# Altium PCB PCB5.PcbDoc
Units mm, origin at the board's own origin, x right, y up, seen from the top; angles counter-clockwise.
Board outline 90 x 98 mm, 2 copper layers (Top Layer, Bottom Layer); 37 components, 41 nets, 179 pads, 5 vias.
Unrouted connection lines stored in the file: 3.
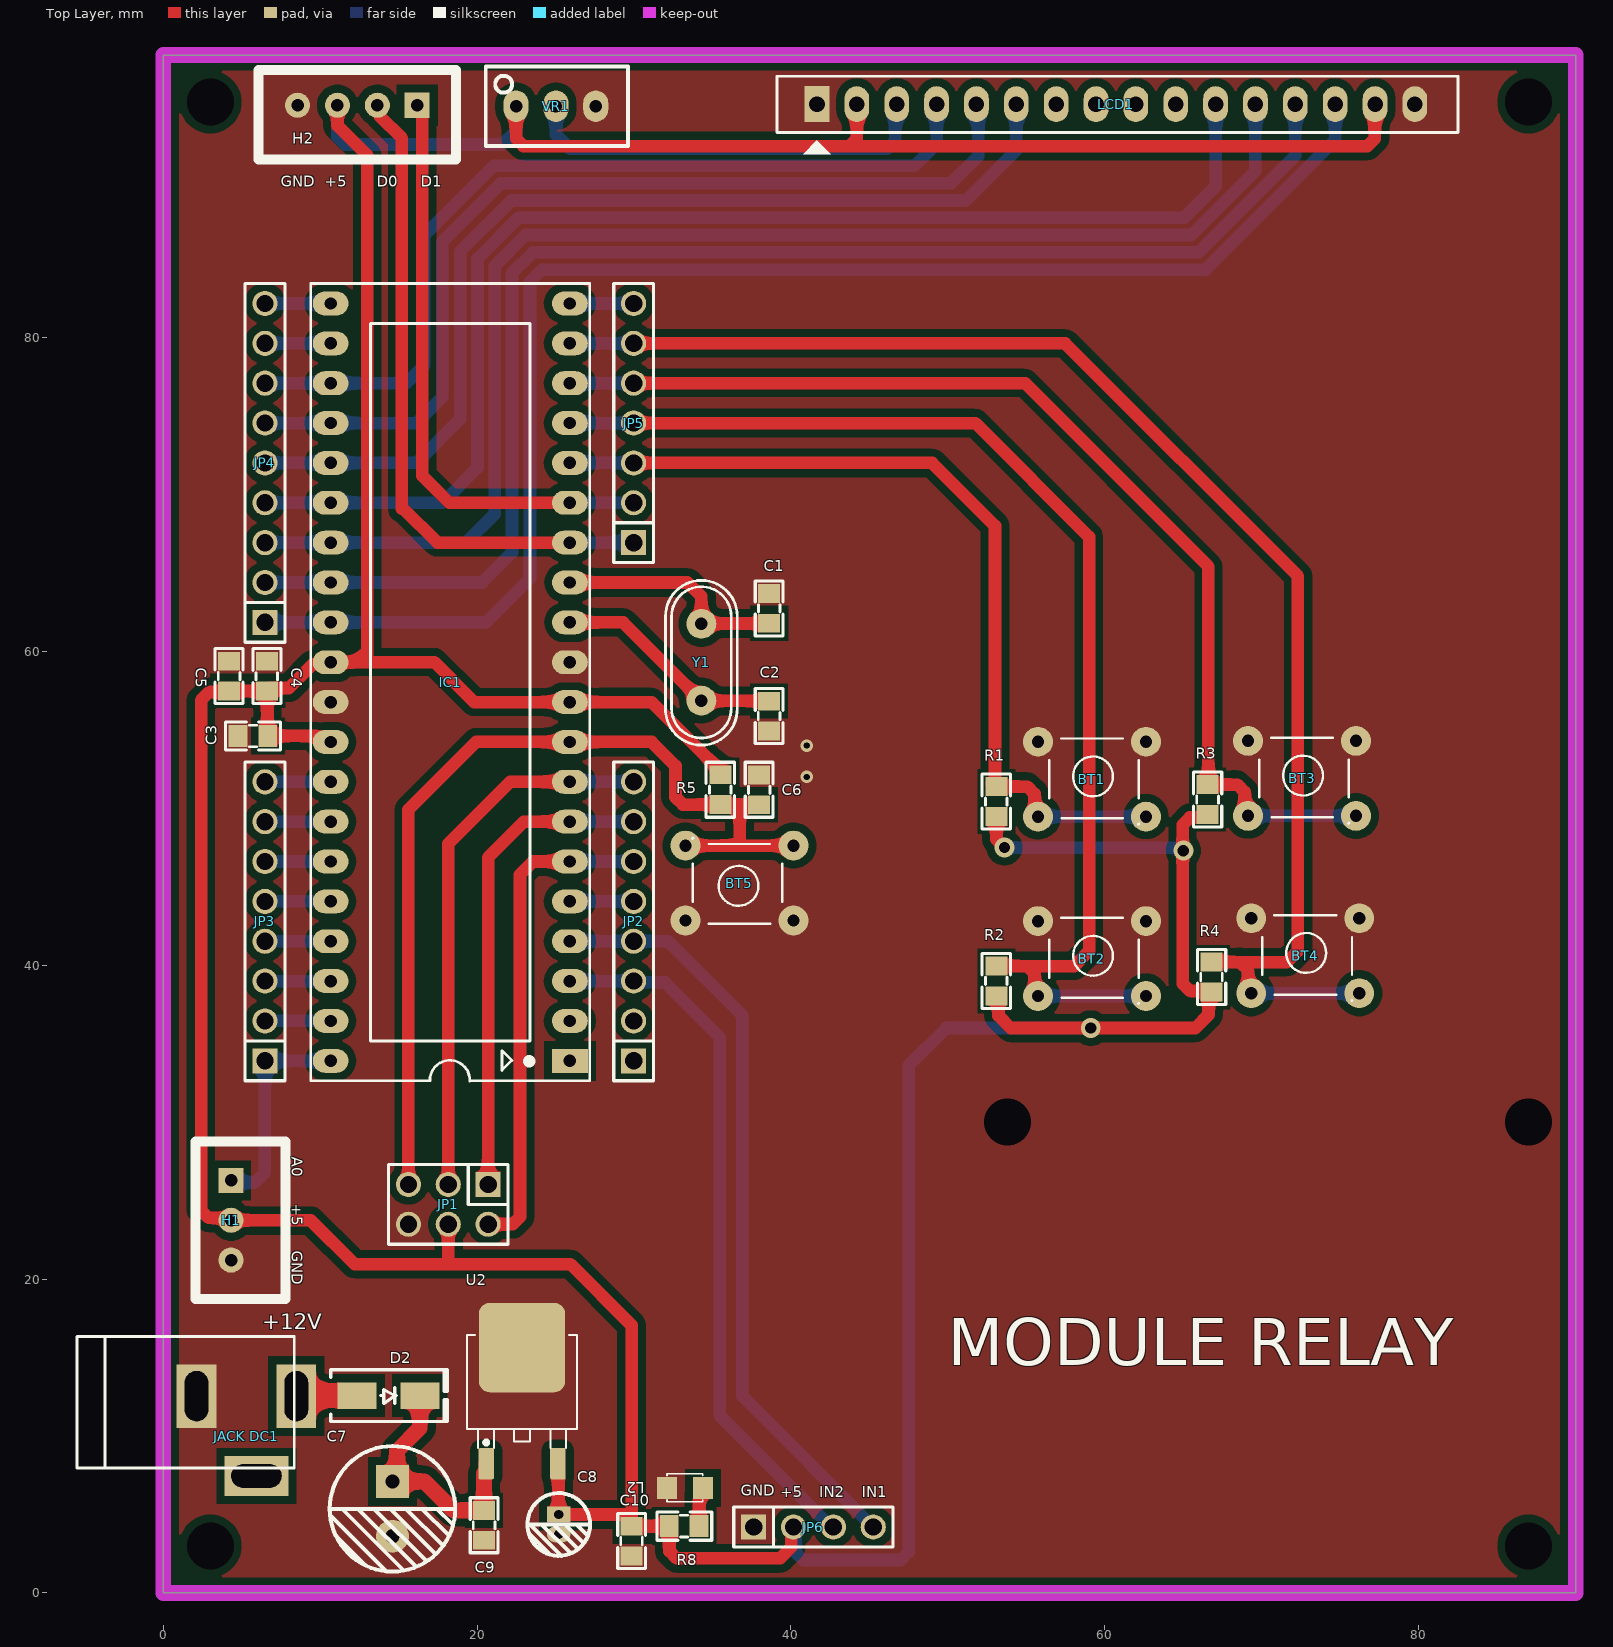
[diagram p0: Top Layer view]
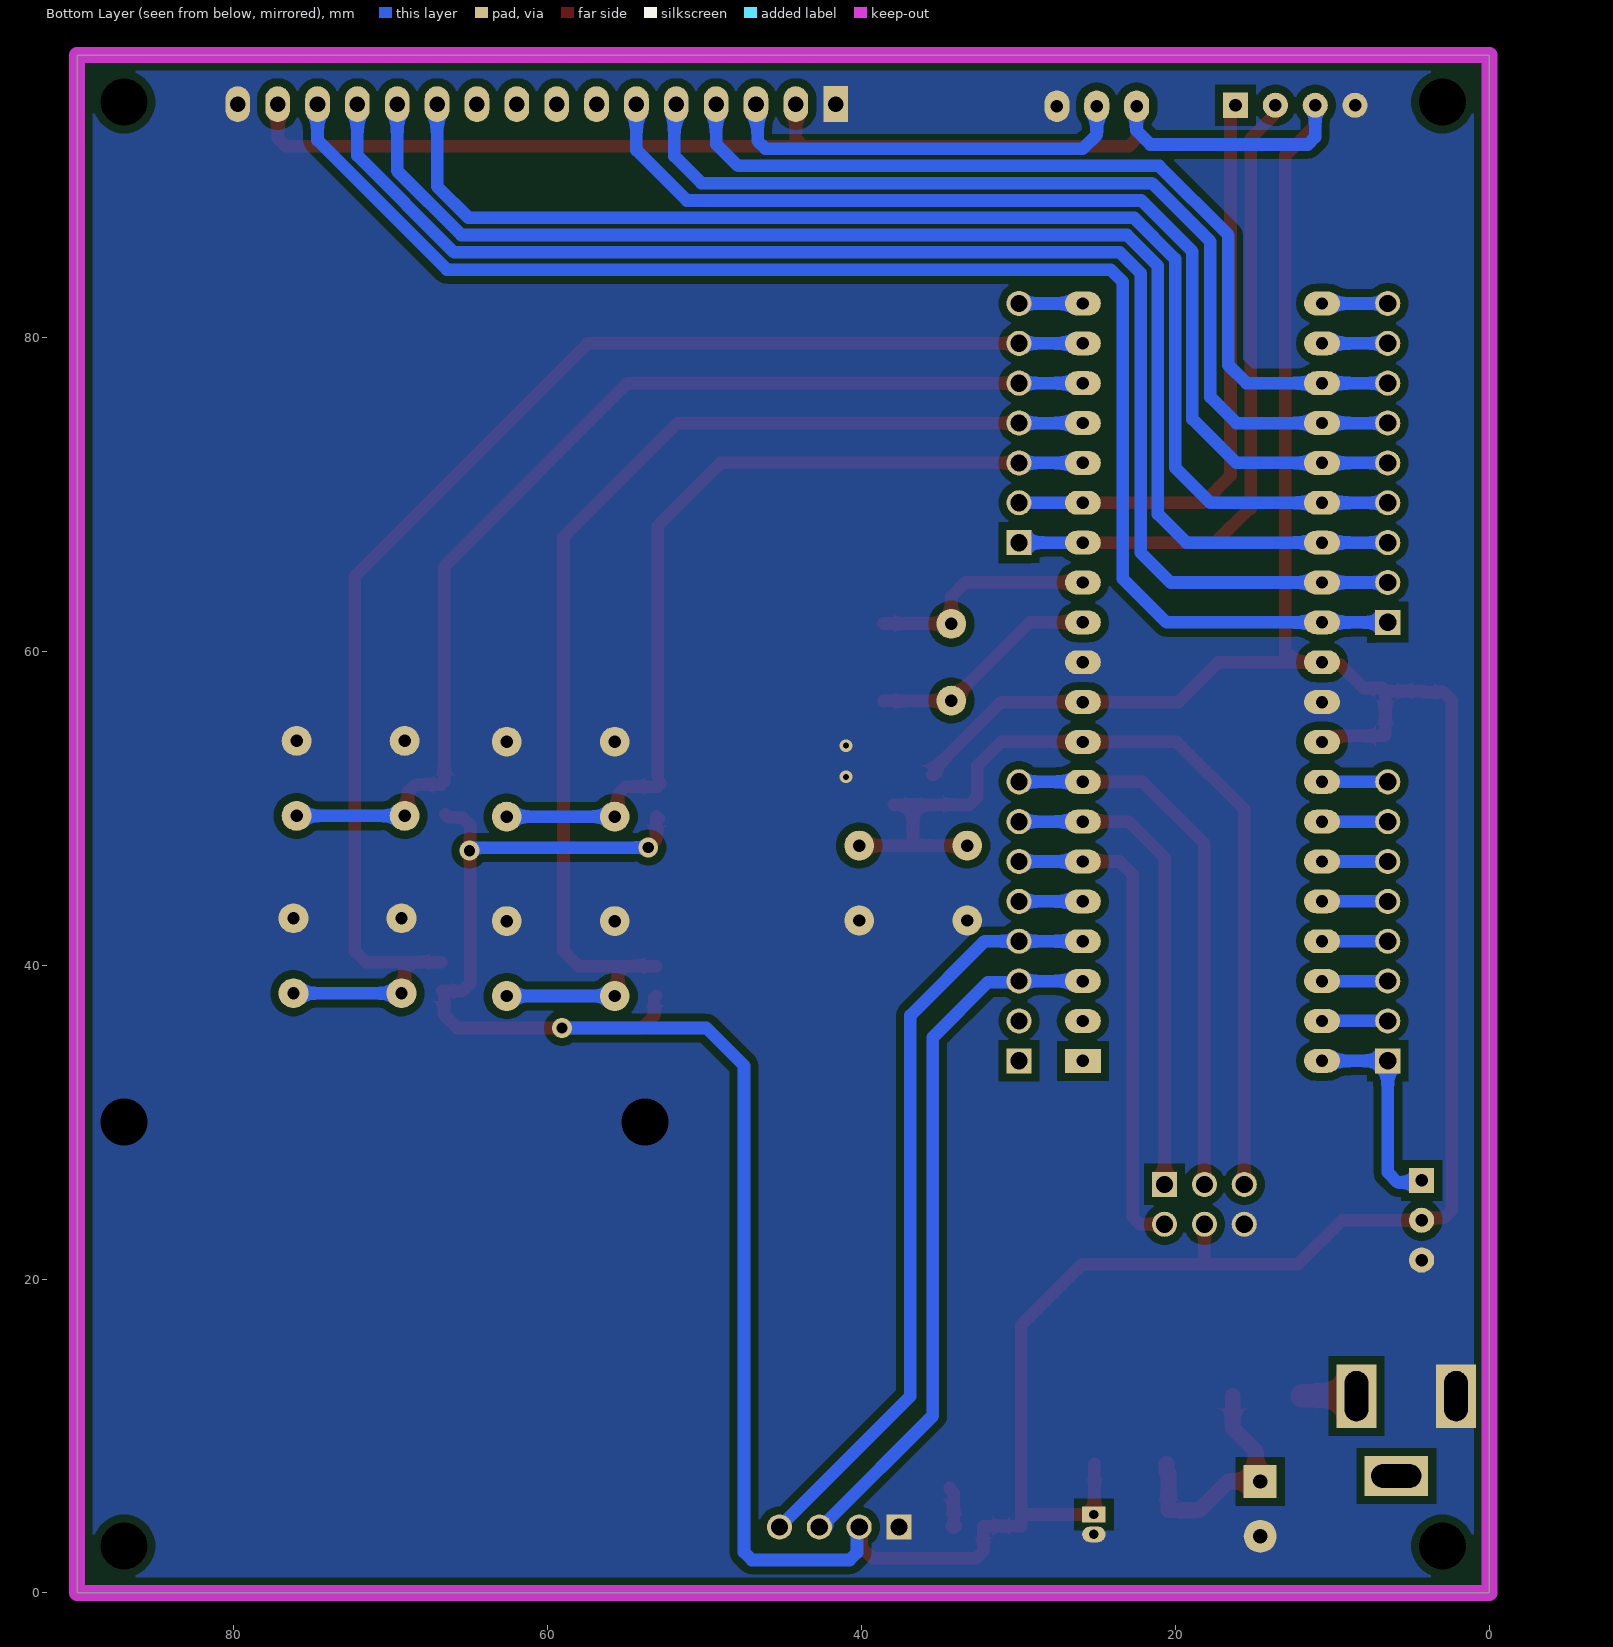
[diagram p1: Bottom Layer view, seen from below]
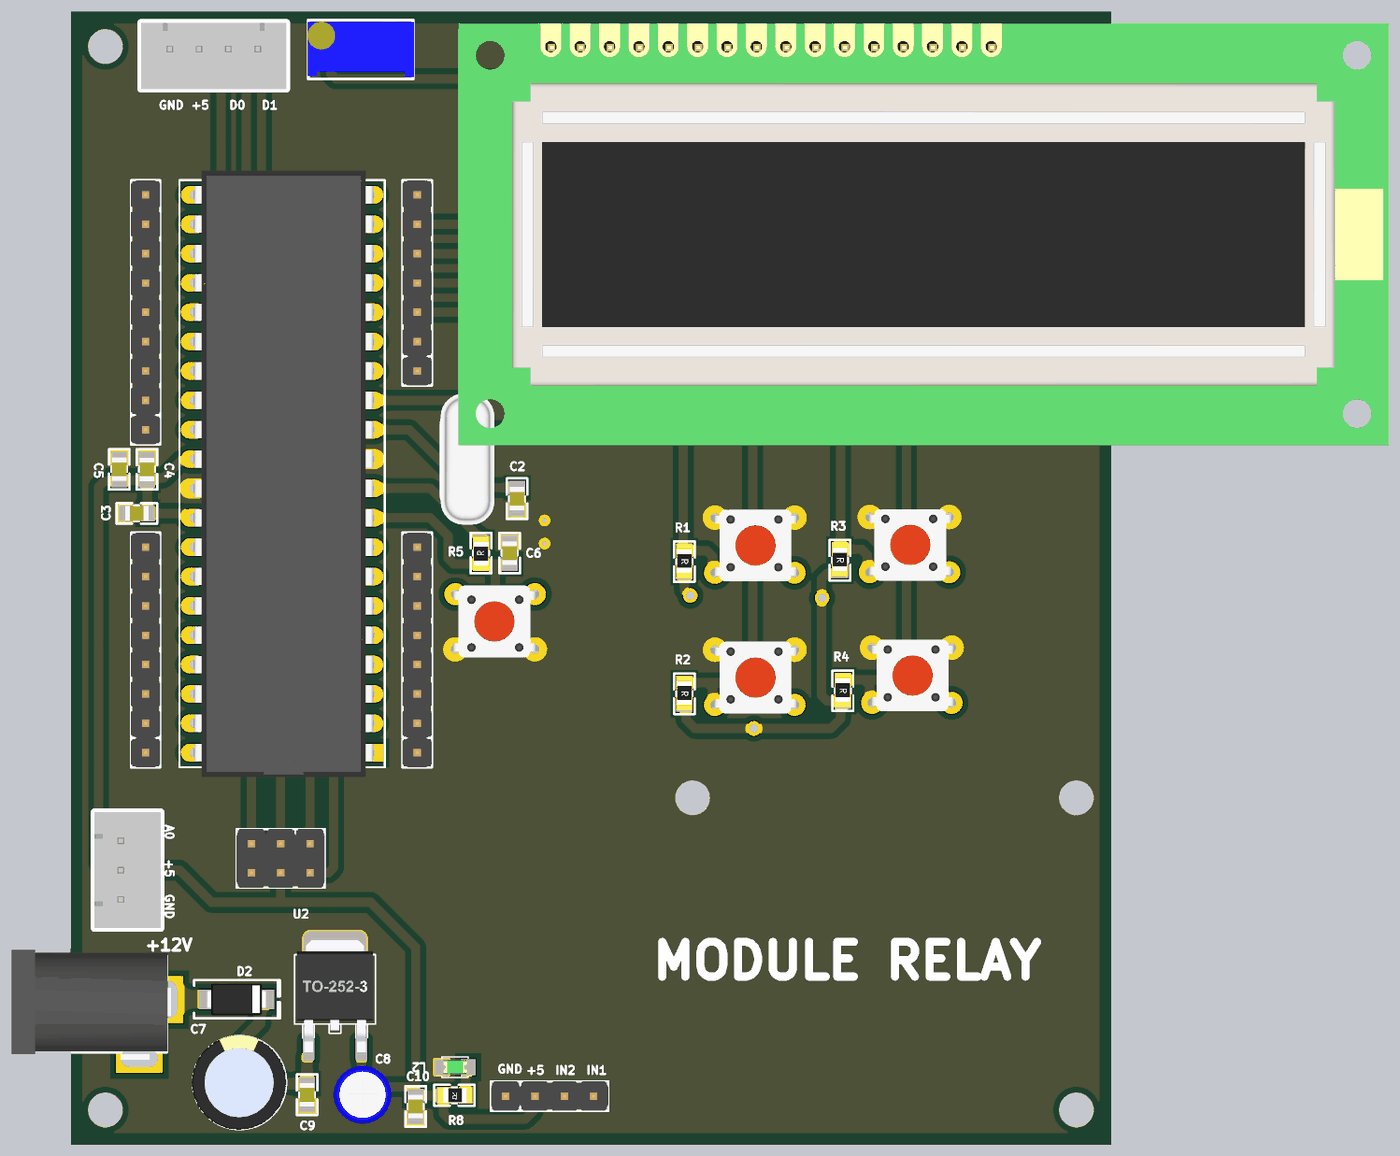
[diagram p2: 3D render of the assembled board from above, using the file's embedded part models]

## Layer stack, top to bottom
Top Solder: solder mask 0.0102, Solder Resist, Dk 3.5
Top Layer: signal copper 0.0356
Dielectric 1: dielectric 0.32, FR-4, Dk 4.8
Bottom Layer: signal copper 0.0356
Bottom Solder: solder mask 0.0102, Solder Resist, Dk 3.5

## Board outline
0,0 90,0 90,98 0,98

## Design rules (kind name [scope] priority, off if disabled: settings)
Clearance [All] p1: gap=0.5 ignorepadtopadclearanceinfootprint=FALSE
PlaneConnect [All] p1: planeconnectstyle=Direct reliefexpansion=0.508 reliefentries=4 reliefconductorwidth=0.254 reliefairgap=0.254
PolygonConnect [All] p1: connectstyle=Direct reliefconductorwidth=0.254 reliefentries=4 polygonreliefangle="90 Angle" airgapwidth=0.254
RoutingVias [All] p1: holewidth=0.711 width=1.27 viastyle="Through Hole" minholewidth=0.711 minwidth=1.27 maxholewidth=0.711 maxwidth=1.27
SolderMaskExpansion [All] p1: expansion=0.102 istentingtop=FALSE
Width [All] p1: maxlimit=1 minlimit=0.3 preferedwidth=0.8
29 further rules are at their usual default settings.

## Components (designator, comment, footprint, x,y, rotation, side; value= is the part's Value field where it differs from the comment)
BT1 "Nut Nhan 4 Chan Cam 6x6" "Nut Nhan 4 Chan Cam 6x6" 56.067,54.447 r0 top
BT2 "Nut Nhan 4 Chan Cam 6x6" "Nut Nhan 4 Chan Cam 6x6" 56.067,43.017 r0 top
BT3 "Nut Nhan 4 Chan Cam 6x6" "Nut Nhan 4 Chan Cam 6x6" 69.453,54.498 r0 top
BT4 "Nut Nhan 4 Chan Cam 6x6" "Nut Nhan 4 Chan Cam 6x6" 69.656,43.195 r0 top
BT5 "Nut Nhan 4 Chan Cam 6x6" "Nut Nhan 4 Chan Cam 6x6" 39.827,42.647 r180 top
C1 "22pF" "tu 0805" 38.608,62.738 r90 top
C2 "22pF" "tu 0805" 38.608,55.88 r270 top
C3 "101" "tu 0805" 5.715,54.61 r180 top
C4 "106" "tu 0805" 6.604,58.42 r270 top
C5 "101" "tu 0805" 4.191,58.42 r90 top
C6 "105" "tu 0805" 37.973,51.181 r270 top
C7 "1000uF" "tu hoa 8mm" 14.605,5.362 r270 top
C8 "10uF" "tu hoa 4mm" 25.2,4.365 r270 top
C9 "104" "tu 0805" 20.447,4.318 r270 top
C10 "104" "tu 0805" 29.845,3.302 r270 top
D2 "M7" "DIODE SMA" 14.351,12.573 r0 top
H1 "Header 3P 2.54 Duc Thang" XH2.54M-3 4.318,26.289 r270 top
H2 "Header 4P 2.54 Duc Thang" XH2.54M-4 16.18,94.8 r180 top
IC1 "ATMEL 16A" DIP40/W0.6 25.908,33.909 r90 top value="Atmega 16L"
"JACK DC1" "JACK DC 5.5" "JACK DC 5.5" 5.3,10 r0 top value="Jac DC"
JP1 "JP 2x3 2.54" "JP 2x3 DT" 18.161,24.765 r180 top
JP2 "JP 1x8 2.54" "JP 1x8 DT" 29.972,33.909 r90 top
JP3 "JP 1x8 2.54" "JP 1x8 DT" 6.477,33.909 r90 top
JP4 "JP 1x9 2.54" "JP 1x9 DT" 6.477,61.849 r90 top
JP5 "JP 1x7 2.54" "JP 1x7 DT" 29.972,66.929 r90 top
JP6 "JP 1x4 2.54" "JP 1x4 DT" 37.62,4.2 r0 top
L2 "LED 0805" LED-0805-Green 34.386,6.7 r180 top
LCD1 "LCD 16x2A" LCD16X2N 41.656,94.869 r0 top value=LCD16x2A
R1 "10k" "tro smd 0805" 53.146,50.434 r270 top
R2 "10k" "tro smd 0805" 53.146,39.004 r270 top
R3 "10k" "tro smd 0805" 66.608,50.561 r270 top
R4 "10k" "tro smd 0805" 66.862,39.258 r270 top
R5 "10k" "tro smd 0805" 35.433,51.181 r90 top
R8 "1k" "tro smd 0805" 33.2,4.2 r180 top
U2 "78M05 SMD TO252" TO252 22.86,11.938 r0 top
VR1 "10K" "Bien Tro Vi Chinh Dung" 25.019,94.742 r0 top
Y1 "16Mhz" "Thach Anh 2 chan cam" 34.29,59.309 r90 top value=4Mhz

## Footprints (in the part's own frame and the unit in brackets; to place one, negate y for a bottom-side part, rotate by r counter-clockwise, add the part's x,y. Pads: shape width x height; smd on the part's side, far side on the other; paste and mask are expansions set on the pad)
"Bien Tro Vi Chinh Dung" [mm] "Bien tro vi chinh"
  oval 1.6x2 hole 0.8: 1(-2.54,0) 2(0,0) 3(2.54,0)
  silkscreen extent -4.47,-2.54 4.6,2.54, body extent -4.54,-2.4 4.66,2.4, height 12.02
"DIODE SMA" [mm] "SMA"
  rect 2.5x1.7 smd: 1(-2,0) 2(2,0)
  silkscreen extent -3.68,-1.65 3.75,1.65, body extent -2.6,-1.37 2.6,1.37, height 2.4
DIP40/W0.6 [mil] "40 PIN, W 600mil, Pin to pin 100mil"
  rect 60x90 hole 31: 1(0,0)
  oval 60x90 hole 31: 2(100,0) 3(200,0) 4(300,0) 5(400,0) 6(500,0) 7(600,0) 8(700,0) 9(800,0) 10(900,0) 11(1000,0) 12(1100,0) 13(1200,0) 14(1300,0) 15(1400,0) 16(1500,0) 17(1600,0) 18(1700,0) 19(1800,0) 20(1900,0) 21(1900,600) 22(1800,600) 23(1700,600) 24(1600,600) 25(1500,600) 26(1400,600) 27(1300,600) 28(1200,600) 29(1100,600) 30(1000,600) 31(900,600) 32(800,600) 33(700,600) 34(600,600) 35(500,600) 36(400,600) 37(300,600) 38(200,600) 39(100,600) 40(0,600)
  silkscreen extent -50,-50 1950,650, body extent -82,-10 1982,600, height 224
"JACK DC 5.5" [mm] "Jac DC input"
  rect 2.54x4.064 hole 1.5 slot 3.2 at 90 deg: 1(3.175,2.54) 2(-3.175,2.54)
  rect 4.064x2.54 hole 1.5 slot 3.2 at 0 deg: 3(0.635,-2.54)
  silkscreen extent -10.79,-2.03 3.05,6.35, body extent -10.42,-2.67 3.4,6.84, height 11.02
"JP 1x4 DT" [mm] "4 pins, 1 row, straight, gold plating"
  rect 1.6x1.6 hole 1.1: 1(0,0)
  round 1.6 hole 1.1: 2(2.54,0) 3(5.08,0) 4(7.62,0)
  silkscreen extent -1.27,-1.27 8.89,1.27, body extent -1.27,-1.27 8.89,1.27, height 8.54
"JP 1x7 DT" [mm] "7 pins, 1 row, straight, gold plating"
  rect 1.6x1.6 hole 1.1: 1(0,0)
  round 1.6 hole 1.1: 2(2.54,0) 3(5.08,0) 4(7.62,0) 5(10.16,0) 6(12.7,0) 7(15.24,0)
  silkscreen extent -1.27,-1.27 16.51,1.27, body extent -1.27,-1.27 16.51,1.27, height 8.54
"JP 1x8 DT" [mm] "8 pins, 1 row, straight, gold plating"
  rect 1.6x1.6 hole 1.1: 1(0,0)
  round 1.6 hole 1.1: 2(2.54,0) 3(5.08,0) 4(7.62,0) 5(10.16,0) 6(12.7,0) 7(15.24,0) 8(17.78,0)
  silkscreen extent -1.27,-1.27 19.05,1.27, body extent -1.27,-1.27 19.05,1.27, height 8.54
"JP 1x9 DT" [mm] "9 pins, 1 row, straight, gold plating"
  rect 1.6x1.6 hole 1.1: 1(0,0)
  round 1.6 hole 1.1: 2(2.54,0) 3(5.08,0) 4(7.62,0) 5(10.16,0) 6(12.7,0) 7(15.24,0) 8(17.78,0) 9(20.32,0)
  silkscreen extent -1.27,-1.27 21.59,1.27, body extent -1.27,-1.27 21.59,1.27, height 8.54
"JP 2x3 DT" [mm]
  rect 1.6x1.6 hole 1.1: 1(-2.54,-1.27)
  round 1.6 hole 1.1: 2(0,-1.27) 3(2.54,-1.27) 4(2.54,1.27) 5(0,1.27) 6(-2.54,1.27)
  silkscreen extent -3.81,-2.54 3.81,2.54, body extent -3.81,-2.54 3.81,2.54, height 8.55
LCD16X2N [mil] "LCD dipslay 16x2, 16 pin"
  rect 62x90 hole 39: 1(0,0)
  oval 62x90 hole 39: 2(100,0) 3(200,0) 4(300,0) 5(400,0) 6(500,0) 7(600,0) 8(700,0) 9(800,0) 10(900,0) 11(1000,0) 12(1100,0) 13(1200,0) 14(1300,0) 15(1400,0) 16(1500,0)
  silkscreen extent -100,-125 1608,70, body extent -320,-1353 2850,84, height 764
LED-0805-Green [mil]
  rect 50x55 smd: 1(0,0) 2(90,0)
  silkscreen extent 0,-35 90,35, body extent 5,-25 85,25, height 43
"Nut Nhan 4 Chan Cam 6x6" [mil] "SW button 4pin, 250 x250 mil"
  round 75 hole 31: 1(-13,-8) 1(258,-8) 2(-13,-196) 2(258,-196)
  silkscreen extent 15,-215 240,0, body extent -31,-225 281,19, height 276
"Thach Anh 2 chan cam" [mm]
  round 1.905 hole 0.8: 1(-2.45,0) 2(2.45,0)
  silkscreen extent -5.28,-2.29 5.21,2.29, body extent -5.68,-2.36 5.68,2.29, height 3.5
TO252 [mm] "TO252"
  round 0.5 on Mech15: 0(0,0)
  rrect25% 1x2 smd: 1(-2.285,-3.7) 3(2.285,-3.7)
  rrect25% 5.5x5.7 smd: 2(0,3.7)
  silkscreen extent -3.5,-2.7 3.5,4.5, body extent -3.3,-3.95 3.3,5.76, height 2.31
"tro smd 0805" [mm]
  rect 1.2x1.4 smd: 1(-0.946,-0.061) 2(0.954,-0.061)
  silkscreen extent -1.75,-0.97 1.75,0.84, body extent -1.56,-0.76 1.44,0.64, height 0.53
"tu 0805" [mm] "Compoment SMD 80x50mil"
  rect 1.2x1.4 smd: 1(-0.946,-0.003) 2(0.954,-0.003)
  silkscreen extent -1.75,-0.89 1.75,0.89, body extent -1.01,-0.64 1.01,0.63, height 0.61
"tu hoa 4mm" [mm]
  rect 1x1.5 hole 0.6: 1(-0.635,0)
  oval 1x1.5 hole 0.6: 2(0.635,0)
  silkscreen extent -2,-2 2.01,2.01, body extent -2.47,-2.47 2.58,2.58, height 14.81
"tu hoa 8mm" [mm]
  rect 2.1x2.1 hole 0.9: 1(-1.75,0)
  round 2.1 hole 0.9: 2(1.75,0)
  silkscreen extent -4,-4 4,4, body extent -4.1,-4.14 4.09,4.06, height 15.4
XH2.54M-3 [mm]
  rect 1.6x1.6 hole 0.8: 1(0,0)
  round 1.6 hole 0.8: 2(2.54,0) 3(5.08,0)
  silkscreen extent -2.48,-2.26 7.56,3.46, body extent -2.48,-2.26 7.56,3.48, height 6.91
XH2.54M-4 [mm]
  rect 1.6x1.6 hole 0.8: 1(0,0)
  round 1.6 hole 0.8: 2(2.54,0) 3(5.08,0) 4(7.62,0)
  silkscreen extent -2.48,-2.26 10.1,3.46, body extent -2.48,-2.26 10.1,3.48, height 6.91

## Part data
BT1 BT2 BT3 BT4 BT5: "Nut Nhan 4 Chan 6x6mm", Ma_Hang=MH004584, Ten="Nút Nhấn 4 Chân 6x6x5MM DIP"
C1 C2: library part "Tu 0805 22pF 50V 10%", "Dán", Chung_Loai=Dán, Don_Vi=Con, Ma_Hang=MH004560, So_Chan=2, Ten_Linh_Kien="Tụ 0805 22P 10% 50V"
C3 C5: library part "Tu 0805 101 50V 20%", "Dán", Chung_Loai=Dán, Don_Vi=Con, Ma_Hang=MH002806, So_Chan=2, Ten_Linh_Kien="Tụ 0805 101-0.1nF 50V 20%"
C4: library part "Tu 0805 106 16V 10%", "Dán", Chung_Loai=Dán, Don_Vi=Con, Ma_Hang=MH004553, So_Chan=2, Ten_Linh_Kien="Tụ 0805 106-10uF 10% 16V"
C6: library part "Tu 0805 105 50V 10%", "Dán", Chung_Loai=Dán, Don_Vi=Con, Ma_Hang=MH004552, So_Chan=2, Ten_Linh_Kien="Tụ 0805 105-1uF 10% 50V"
C7: library part "Tu Hoa 1000uF 16V 8x20", "Cắm", Chung_Loai=Cắm, Don_Vi=Con, Ma_Hang=MH008300, So_Chan=2, Ten_Linh_Kien="Tụ Hóa 1000uF 16V 8x20MM"
C8: library part "Tu Hoa 10uF 16V 4x7", "Cắm", Chung_Loai=Cắm, Don_Vi=Con, Ma_Hang=MH006855, So_Chan=2, Ten_Linh_Kien="Tụ Hóa 10uF 16V"
C9 C10: library part "Tu 0805 104 50V 10%", "Dán", Chung_Loai=Dán, Don_Vi=Con, Ma_Hang=MH004551, So_Chan=2, Ten_Linh_Kien="Tụ 0805 104-100nF 10% 50V"
D2: library part "Diode M7 ( 4007 )", "Dán", Chung_Loai=Dán, Don_Vi=Con, Ma_Hang=MH000944, Ten_Linh_Kien="Diode M7 1N4007 SMD 1A 1000V"
H1 H2: "Cắm", Chung_Loai=Cắm, Don_Vi=Con
  H1: Ma_Hang=MH001292, Ten_Linh_Kien="Header 3P XH2.54-3P Đực Thẳng"
  H2: Ma_Hang=MH001285, Ten_Linh_Kien="Header 4P XH2.54-4P Đực Thẳng"
IC1: library part ATmega16A-PU, "8-Bit AVR Microcontroller with 16K Bytes of In-System Programmable Flash Memory"
JP1: library part "JP 2x3 2.54 Duc Thang", "Cắm", Chung_Loai=Cắm, Don_Vi=Con, Ma_Hang=MH002686, Ten_Linh_Kien="Jump Đôi Đực 2.54MM 2x40P Thẳng 11MM"
JP2 JP3: library part "JP 1x8 2.54 Duc Thang", "Cắm", Chung_Loai=Cắm, Don_Vi=Con, Ma_Hang=MH000903, Ten_Linh_Kien="Jump Đơn Đực 2.54MM 1x40P Thẳng 11MM"
JP4: library part "JP 1x9 2.54 Duc Thang", "Cắm", Chung_Loai=Cắm, Don_Vi=Con, Ma_Hang=MH000903, Ten_Linh_Kien="Jump Đơn Đực 2.54MM 1x40P Thẳng 11MM"
JP5: library part "JP 1x7 2.54 Duc Thang", "Cắm", Chung_Loai=Cắm, Don_Vi=Con, Ma_Hang=MH000903, Ten_Linh_Kien="Jump Đơn Đực 2.54MM 1x40P Thẳng 11MM"
JP6: library part "JP 1x4 2.54 Duc Thang", "Cắm", Chung_Loai=Cắm, Don_Vi=Con, Ma_Hang=MH000903, Ten_Linh_Kien="Jump Đơn Đực 2.54MM 1x40P Thẳng 11MM"
L2: library part "LED 0805 Xanh La", "Dán", Chung_Loai=Dán, Don_Vi=Con, Ma_Hang=MH002326, Ten_Linh_Kien="LED 0805 Màu Xanh Lá (Green)"
LCD1: library part LCD16x2A, "LCD dipslay 16 char, 2 line"
R1 R2 R3 R4 R5: library part "Tro 0805 1% 10k", "Dán", Chung_Loai=Dán, Don_Vi=Con, Ma_Hang=MH005473, So_Chan=2, Ten_Linh_Kien="Trở 0805 1% 10k"
R8: library part "Tro 0805 1% 1k", "Dán", Chung_Loai=Dán, Don_Vi=Con, Ma_Hang=MH005468, So_Chan=2, Ten_Linh_Kien="Trở 0805 1% 1k"
U2: "Dán", Chung_Loai=Dán, Don_Vi=Con, Ma_Hang=MH001917, Ten_Linh_Kien="78M05 TO252"
VR1: library part "Bien Tro Tinh Chinh 1K Dung", "Cắm", Chung_Loai=Cắm, Don_Vi=Con, Ma_Hang=MH003234, Ten_Linh_Kien="Biến Trở VR 102-1K 3296W"
Y1: library part "Thach Anh 2 chan Cam", "Crystal For all Crystal 2pin."

## Free pads (board coordinates)
  round 1.524 hole 3: 2(3,3) 3(87,3) 4(87,95) 5(3,95) 6(53.8,30) 7(87,30)

## Via types
v1: diameter 1.27, hole 0.711, Top Layer to Bottom Layer, 3 vias
v2: diameter 0.8, hole 0.4, Top Layer to Bottom Layer, 2 vias

## Nets (pads, with @x,y where several pads share a name; then routed paths per layer and width w, separated by ;. In a path a pad name is that pad's centre, name@x,y a point inside that pad or via, vN(x,y) a via of type N, cw(c..) or ccw(c..) an arc to the next point about the centre after c; other vN are vias at no path point)
+5: C3.1 C4.2 C5.1 C8.1 C10.1 H1.2 H2.3 IC1.10 IC1.30 IC1.32 JP1.5 JP6.2 LCD1.2 LCD1.15 R1.2 R2.2 R3.2 R4.2 R5.2 R8.2 U2.3 VR1.1 | length 356.1
  Top Layer w0.8: IC1.32 10.091,54.229 9.707,54.613 C3.1 6.631,54.643 6.631,57.436 C4.2 ; H2.3 11.1,93.5 13,91.6 13,59.8 ; 12.905,59.895 12.319,59.309 ; 18.161,21.424 JP1.5 ; VR1.1@22.326,94.903 VR1.1@22.487,94.742 ; VR1.1 22.479,92.671 22.948,92.202 43.727,92.202 ; U2.3 25.172,8.21 25.172,5.028 C8.1 29.642,5 29.842,5.2 ; R5.2 35.394,52.135 35.194,52.335 35.194,52.69 31.115,56.769 IC1.10 19.812,56.769 17.272,59.309 12.319,59.309 ; 39.4,2.3 39.3,2.2 32.714,2.2 32.246,2.669 R8.2 32.239,4.254 29.848,4.254 C10.1 29.842,5.2 ; 39.5,2.4 40.007,2.907 40.007,4.047 JP6.2 ; LCD1.2 44.196,92.671 43.727,92.202 ; R1.2@52.939,49.334 R1.2 53.085,48.015 v1(53.6,47.5) ; R2.2 53.216,37.918 53.216,36.784 54,36 v1(59.1,36) 65.763,36 66.608,36.845 66.608,38.241 66.736,38.369 65.426,38.369 64.957,38.838 64.957,48.949 65.426,49.418 66.359,49.418 R3.2 ; LCD1.15 77.199,94.852 77.199,92.671 76.731,92.202 43.727,92.202 ; C4.2 6.801,57.666 8.009,57.666 9.513,59.17 10.529,59.17 IC1.30 12.319,59.309 ; C4.2 6.596,57.47 4.199,57.47 4.133,57.404 2.921,57.404 2.413,56.896 2.413,24.384 2.895,23.902 4.165,23.902 H1.2 9.398,23.749 12.192,20.955 25.945,20.955 29.842,17.058 29.842,5.2
  Bottom Layer w0.8: H2.3 11.1,92.769 11.569,92.3 21.6,92.3 22.5,93.2 VR1.1@22.5,94.9 ; JP6.2 40.3,4.06 40.3,2.569 40.769,2.1 47,2.1 47.5,2.6 47.5,33.6 49.9,36 v1(59.1,36) ; v1(53.6,47.5) 64.673,47.5 64.873,47.3 v1(65,47.3)
+12: C7.1 C9.1 D2.2 U2.1 | length 15.8
  Top Layer w1: D2.2 16.351,10.509 14.89,9.048 14.89,7.397 C7.1 16.637,7.112 18.485,5.264 C9.1 20.444,7.607 20.575,7.738 U2.1
CK: IC1.8 JP1.2 JP2.8 | length 35.2
  Top Layer w0.8: JP1.2 18.161,47.752 22.098,51.689 IC1.8
  Bottom Layer w0.8: IC1.8 JP2.8
EN: IC1.25 JP4.5 LCD1.6 | length 65.3
  Bottom Layer w0.8: JP4.5 IC1.25 16.129,72.009 18.923,74.803 18.923,85.471 22.184,88.732 51.14,88.732 54.356,91.948 LCD1.6
GND: "JACK DC1.2" BT1.1 BT2.1 BT3.1 BT4.1 BT5.1 C1.2 C2.2 C3.2 C4.1 C5.2 C6.1 C7.2 C8.2 C9.2 C10.2 H1.3 H2.4 IC1.11 IC1.31 JP1.4 JP6.1 L2.2 LCD1.1 LCD1.16 pad.6 pad.7 U2.2 VR1.3
  other v2: 41,52 41,54
IN1: IC1.4 JP2.4 JP6.4 | length 48.9
  Bottom Layer w0.8: IC1.4 JP2.4@29.529,41.529 ; JP2.4 32.171,41.529 36.9,36.8 36.9,12.54 JP6.4 45.34,4.1 JP6.4@45.5,4.1
IN2: IC1.3 JP2.3 JP6.3 | length 44.7
  Bottom Layer w0.8: IC1.3 JP2.3@29.689,38.989 ; JP2.3 30.052,38.909 31.972,38.909 35.472,35.408 35.472,11.292 42.2,4.564 JP6.3@42.2,4.3
IN3: IC1.2 JP2.2
IN4: IC1.1 JP2.1
MISO: IC1.7 JP1.1 JP2.7 | length 31
  Top Layer w0.8: JP1.1 20.701,46.863 22.987,49.149 IC1.7
  Bottom Layer w0.8: IC1.7 JP2.7
MOSI: IC1.6 JP1.6 JP2.6 | length 31.6
  Top Layer w0.8: JP1.6 22.264,23.495 22.733,23.964 22.733,45.777 23.565,46.609 IC1.6
  Bottom Layer w0.8: IC1.6 JP2.6
NetD2_1: "JACK DC1.1" D2.1 | length 3.6
  Top Layer w1: 8.475,12.54 8.508,12.573 ; D2.1@11.927,12.573 D2.1@12,12.5
  Top Layer w1.5: 8.508,12.573 D2.1@11.927,12.573
NetL2_1: L2.1 R8.1 | length 2.2
  Top Layer w0.8: R8.1 L2.1@34.146,6.396 ; L2.1@34.386,6.636 L2.1
  Top Layer w1: R8.1@34.117,4.289 R8.1
PA0: H1.1 IC1.40 JP3.1 | length 13.8
  Bottom Layer w0.8: H1.1 4.445,26.162 5.842,26.162 6.477,26.797 JP3.1 IC1.40
PA1: IC1.39 JP3.2 | length 4.2
  Bottom Layer w0.8: JP3.2 IC1.39
PA2: IC1.38 JP3.3 | length 4.2
  Bottom Layer w0.8: JP3.3 IC1.38
PA3: IC1.37 JP3.4 | length 4.2
  Bottom Layer w0.8: JP3.4 IC1.37
PA4: IC1.36 JP3.5 | length 4.2
  Bottom Layer w0.8: JP3.5 IC1.36
PA5: IC1.35 JP3.6 | length 4.2
  Bottom Layer w0.8: JP3.6 IC1.35
PA6: IC1.34 JP3.7 | length 4.2
  Bottom Layer w0.8: JP3.7 IC1.34
PA7: IC1.33 JP3.8 | length 4.2
  Bottom Layer w0.8: JP3.8 IC1.33
PB4: IC1.5 JP2.5 | length 4.1
  Bottom Layer w0.8: IC1.5 JP2.5
PC0: IC1.22 JP4.8 | length 4.2
  Bottom Layer w0.8: JP4.8 IC1.22
PC1: IC1.23 JP4.7 LCD1.4 | length 56.5
  Bottom Layer w0.8: JP4.7 IC1.23 15.494,77.089 16.637,78.232 16.637,86.519 21.05,90.932 47.879,90.932 49.276,92.329 LCD1.4
PC2: IC1.24 JP4.6 LCD1.5 | length 61.7
  Bottom Layer w0.8: JP4.6 IC1.24 16.129,74.549 17.78,76.2 17.78,86.106 21.506,89.832 50.208,89.832 51.943,91.567 51.943,94.742 LCD1.5
PC4: IC1.26 JP4.4 LCD1.11 | length 82
  Bottom Layer w0.8: JP4.4 IC1.26 17.78,69.469 20.023,71.712 20.023,85.015 22.64,87.632 65.058,87.632 67.056,89.63 LCD1.11
PC5: IC1.27 JP4.3 LCD1.12 | length 86.4
  Bottom Layer w0.8: JP4.3 IC1.27 19.304,66.929 21.123,68.748 21.123,84.56 23.095,86.532 65.514,86.532 69.596,90.614 LCD1.12
PC6: IC1.28 JP4.2 LCD1.13 | length 90.6
  Bottom Layer w0.8: JP4.2 IC1.28 20.32,64.389 22.223,66.292 22.223,84.104 23.551,85.432 65.969,85.432 72.136,91.599 LCD1.13
PC7: IC1.29 JP4.1 LCD1.14 | length 94.3
  Bottom Layer w0.8: JP4.1 IC1.29 20.574,61.849 23.368,64.643 23.368,83.566 24.134,84.332 66.425,84.332 74.676,92.583 LCD1.14
PD0: H2.2 IC1.14 JP5.1 | length 42
  Top Layer w0.8: H2.2 13.793,94.647 13.793,94.107 15.2,92.7 15.2,69.1 ; 15.25,69.15 17.471,66.929 IC1.14
  Bottom Layer w0.8: IC1.14@26,66.6 26.329,66.929 JP5.1
PD1: H2.1 IC1.15 JP5.2 | length 33.9
  Top Layer w0.8: H2.1 16.5,94.48 16.5,71.2 18.231,69.469 25.869,69.469 IC1.15@25.9,69.5
PD2: BT1.2 IC1.16 JP5.3 R1.1 | length 56.2
  Top Layer w0.8: JP5.3 48.991,72.009 53,68 53,52 ; R1.1@52.8,51.58 53,51.38 R1.1 55.057,51.38 55.525,50.911 55.525,49.68 BT1.2@55.737,49.469
  Bottom Layer w0.8: IC1.16 JP5.3 ; BT1.2@56.042,49.469 62.62,49.469 BT1.2@62.925,49.469
PD3: BT2.2 IC1.17 JP5.4 R2.1 | length 77.7
  Top Layer w0.8: JP5.4 51.751,74.549 59,67.3 59,49.4 59,40.9 58.05,39.95 R2.1 ; 55.206,39.8 55.525,39.481 55.525,38.25 BT2.2@55.737,38.039
  Bottom Layer w0.8: IC1.17 JP5.4 ; BT2.2@55.737,38.039 BT2.2@62.62,38.039
PD4: BT3.2 IC1.18 JP5.5 R3.1 | length 70.3
  Top Layer w0.8: JP5.5 54.911,77.089 66.6,65.4 66.6,51.707 66.8,51.507 R3.1@66.847,51.507 ; R3.1@66.9,51.507 68.443,51.507 68.911,51.038 68.911,49.731 BT3.2@69.123,49.52
  Bottom Layer w0.8: IC1.18 JP5.5 ; BT3.2@69.123,49.52 BT3.2@76.006,49.52
PD5: BT4.2 IC1.19 JP5.6 R4.1 | length 90.9
  Top Layer w0.8: JP5.6 57.471,79.629 72.3,64.8 72.3,40.9 71.6,40.2 69,40.2 ; R4.1 68.8,40.204 ; 68.8,40 69.114,39.686 69.114,38.428 BT4.2@69.326,38.217
  Bottom Layer w0.8: IC1.19 JP5.6 ; BT4.2@69.326,38.217 BT4.2@76.209,38.217
PD6: IC1.20 JP5.7 | length 4.1
  Bottom Layer w0.8: IC1.20 JP5.7
PD7: IC1.21 JP4.9 | length 4.2
  Bottom Layer w0.8: JP4.9 IC1.21
RST: BT5.2 C6.2 IC1.9 JP1.3 R5.1 | length 60.4
  Top Layer w0.8: JP1.3 15.621,49.911 19.939,54.229 31.115,54.229 32.639,52.705 32.639,50.704 33.108,50.235 R5.1 35.498,50.231 36.732,50.231 ; BT5.2@33.274,47.625 36.449,47.625 ; C6.2 37.965,50.231 36.732,50.231 ; BT5.2@40.157,47.625 36.449,47.625 ; 36.449,47.625 36.732,47.908 36.732,50.231
VEE: LCD1.3 VR1.2 | length 26.4
  Bottom Layer w0.8: VR1.2 25.019,92.921 25.908,92.032 46.14,92.032 46.634,92.526 46.634,94.767 LCD1.3
XTAL1: C1.1 IC1.13 Y1.2 | length 14.8
  Top Layer w0.8: IC1.13 33.401,64.389 34.29,63.5 Y1.2 34.307,61.776 38.595,61.776 C1.1
XTAL2: C2.1 IC1.12 Y1.1 | length 14.8
  Top Layer w0.8: IC1.12 29.3,61.849 34.307,56.842 38.588,56.842 C2.1
pads on no net: "JACK DC1.3" LCD1.7 LCD1.8 LCD1.9 LCD1.10 U2.0
copper on no net: | length 4.1
  Bottom Layer w0.8: 25.908,69.469 29.972,69.469

## Polygon pours and split planes (outlines as drawn)
GND on Top Layer "NONET_L01_P-001" (solid, remove dead copper, pour order 0): -0.1,0.1 -0.1,98 90,98 90,0
GND on Bottom Layer "NONET_L01_P-001" (solid, remove dead copper, pour order 1): 0,0 0,98 90,98 90,0

## Keep-outs
Keep-Out Layer:
  the board outline again, w1

## Silkscreen, mask and mechanical layers (free items; w line width, h text height)
Top Overlay:
  text "GND" at 7.5,89.6 h0.7
  text "+5" at 10.3,89.6 h0.7
  text "D0" at 13.6,89.6 h0.7
  text "D1" at 16.4,89.6 h0.7
  text "A0" at 8.2,27.8 h0.7 r270
  text "+5" at 8.2,24.8 h0.7 r270
  text "GND" at 8.2,21.8 h0.7 r270
  text "+12V" at 6.3,16.8 h1
  text "MODULE RELAY" at 50,14.5 h3
  text "GND" at 36.8,6.2 h0.7
  text "+5" at 39.3,6.1 h0.7
  text "IN2" at 41.8,6.1 h0.7
  text "IN1" at 44.5,6.1 h0.7